# EAGLE board Start-Stop Motor (EAGLE 9.7.0)

Size 184.25 x 67.87 mm. Coordinates in mm from the lower left corner, seen from the top.
Outline: 0,0 184.25,0 184.25,67.87 0,67.87 0,0
Copper layers (1*16): Top 0.035mm / dielectric 1.5mm / Bottom 0.035mm
Design rules "default": minimum track width 6mil, minimum drill 0.35mm, track to track 6mil, track to pad 6mil, pad to pad 6mil, via to via 6mil, smd to smd 6mil, copper to edge 40mil, drill to drill 6mil, minimum pad ring 10mil, minimum via ring 8mil, stop-mask expansion 4mil, vias tented up to drill 0mil, thermal gap 10mil

## Footprints (pad centres in the part's own frame; a part is rotated, then mirrored left to right if it is on the bottom)
LEDRD254W60D565H860B_G = drill 0.981 pad 1.581: 1 -1.27,0; 2 1.27,0
LEDRD254W60D565H860B = drill 0.981 pad 1.581: 1 -1.27,0; 2 1.27,0
MOTOR = drill 1.118 pad 3.15 octagon: + 2.54,0; - -2.54,0
RESAD1016W63L850D250B = drill 0.83 pad 1.43: 1 -5.08,0; 2 5.08,0
SWITCH-MOMENTARY-PTH-6.5MM = drill 1.016 pad 1.88: 1 -3.251,2.261; 2 3.251,2.261; 3 -3.251,-2.261; 4 3.251,-2.261
ARDUINO-UNO-R3-SHIELD = drill 1.016 pad 1.88: 3.3V 24.13,-2.54; 5V 24.13,0; A0 24.13,12.7; A1 24.13,15.24; A2 24.13,17.78; A3 24.13,20.32; A4 24.13,22.86; A5 24.13,25.4; AREF -24.13,-13.97; D2 -24.13,20.32; D3 -24.13,17.78; D4 -24.13,15.24; D5 -24.13,12.7; D6 -24.13,10.16; D7 -24.13,7.62; D8 -24.13,3.81; D9 -24.13,1.27; D10 -24.13,-1.27; D11 -24.13,-3.81; D12 -24.13,-6.35; D13 -24.13,-8.89; GND@0 24.13,2.54; GND@1 24.13,5.08; GND@2 -24.13,-11.43; IOREF 24.13,-7.62; NC 24.13,-10.16; RES 24.13,-5.08; RX -24.13,25.4; SCL -24.13,-19.05; SDA -24.13,-16.51; TX -24.13,22.86; VIN 24.13,7.62

## Placement (x,y rotation side)
D4  GREEN  [LEDRD254W60D565H860B_G]  160.41,41.37 180 top
D5  RED  [LEDRD254W60D565H860B]  178.19,41.37 180 top
M1  MOTOR_HDR  [MOTOR]  147.01,59.62 0 top
R1  220  [RESAD1016W63L850D250B]  171.84,38.83 0 top
R2  220  [RESAD1016W63L850D250B]  154.06,38.83 0 top
R3  10k  [RESAD1016W63L850D250B]  123.58,46.45 90 top
R4  10k  [RESAD1016W63L850D250B]  110.88,46.45 90 top
S1  SWITCH_MOMENTARY  [SWITCH-MOMENTARY-PTH-6.5MM]  113.42,27.4 90 top
S2  SWITCH_MOMENTARY  [SWITCH-MOMENTARY-PTH-6.5MM]  126.12,27.4 90 top
UARDUINOUNOR3  ARDUINO-UNO-R3-SHIELD  [ARDUINO-UNO-R3-SHIELD]  47.88,29.84 270 top

## Library data of the parts
D4 = Tinkercad; CATEGORY: Opto-Electronic; SUB-CATEGORY: LED; VALUE: LED_GREEN
D5 = Tinkercad; CATEGORY: Opto-Electronic; SUB-CATEGORY: LED; VALUE: LED_RED
M1 R1-R4 S1 S2 UARDUINOUNOR3 = Tinkercad

## Nets
D4_C: D4.2 R2.2
D5_C: D5.2 R1.2
UARDUINOUNOR3_5V: R3.2 R4.2 UARDUINOUNOR3.5V
UARDUINOUNOR3_D2: R4.1 S1.1 S1.2 UARDUINOUNOR3.D2
UARDUINOUNOR3_D3: R3.1 S2.1 S2.2 UARDUINOUNOR3.D3
UARDUINOUNOR3_D4: D5.1 UARDUINOUNOR3.D4
UARDUINOUNOR3_D5: D4.1 UARDUINOUNOR3.D5
UARDUINOUNOR3_D6: M1.+ UARDUINOUNOR3.D6
UARDUINOUNOR3_GND: M1.- R1.1 R2.1 S1.3 S1.4 S2.3 S2.4 UARDUINOUNOR3.GND@0 UARDUINOUNOR3.GND@1 UARDUINOUNOR3.GND@2

## Tracks (layer width: path | path; a pad name or v marks a point on that pad's centre or on a via)
D4_C  (1 unrouted)
D5_C  (1 unrouted)
UARDUINOUNOR3_5V  (2 unrouted)
UARDUINOUNOR3_D2  (3 unrouted)
UARDUINOUNOR3_D3  (3 unrouted)
UARDUINOUNOR3_D4  (1 unrouted)
UARDUINOUNOR3_D5  (1 unrouted)
UARDUINOUNOR3_D6  (1 unrouted)
UARDUINOUNOR3_GND  (9 unrouted)